# Altium PCB main.PcbDoc
Units mil, origin at the board's own origin, x right, y up, seen from the top; angles counter-clockwise.
Board outline 2165.35 x 1082.68 mil, 2 copper layers (Top Layer, Bottom Layer); 41 components, 28 nets, 122 pads, 68 vias.
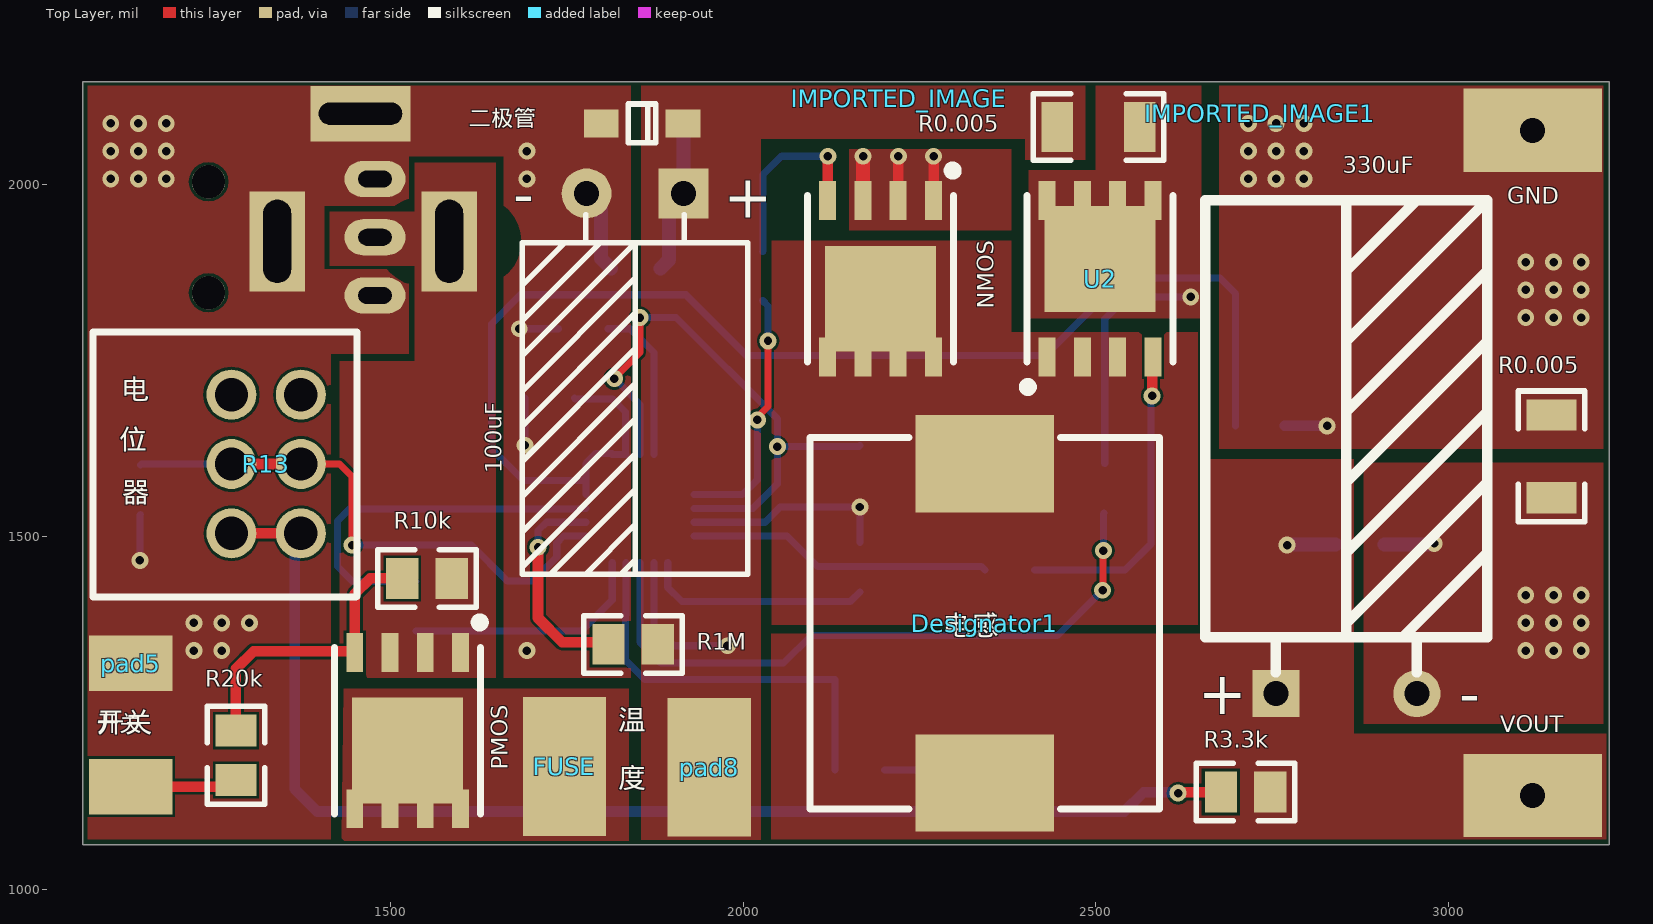
[diagram p0: Top Layer view]
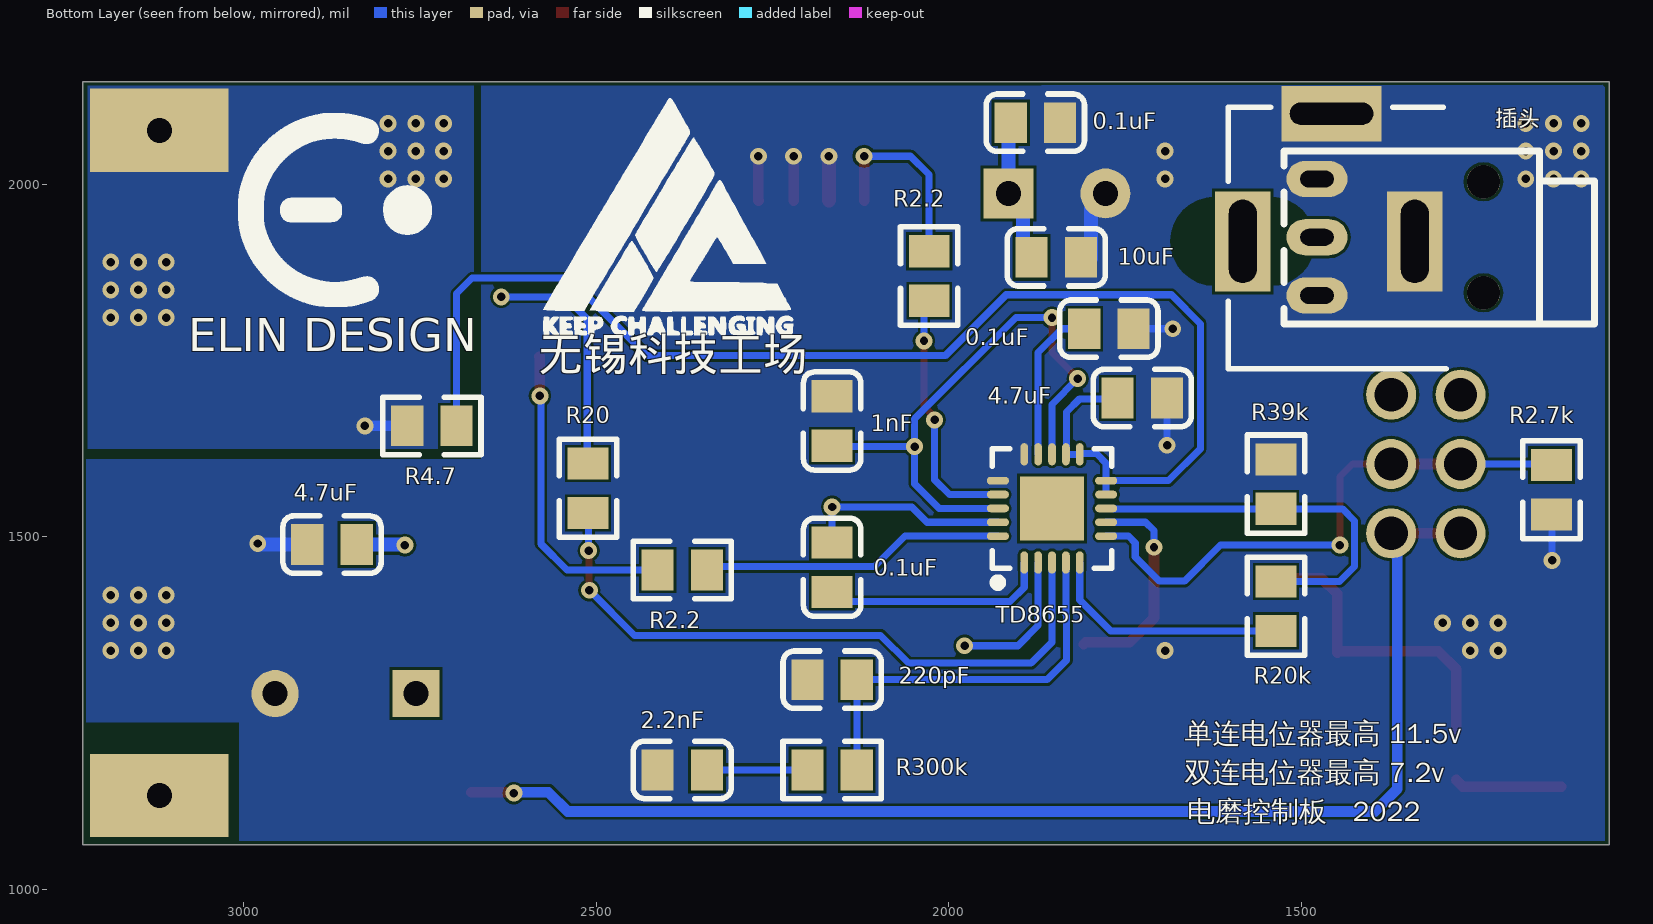
[diagram p1: Bottom Layer view, seen from below]
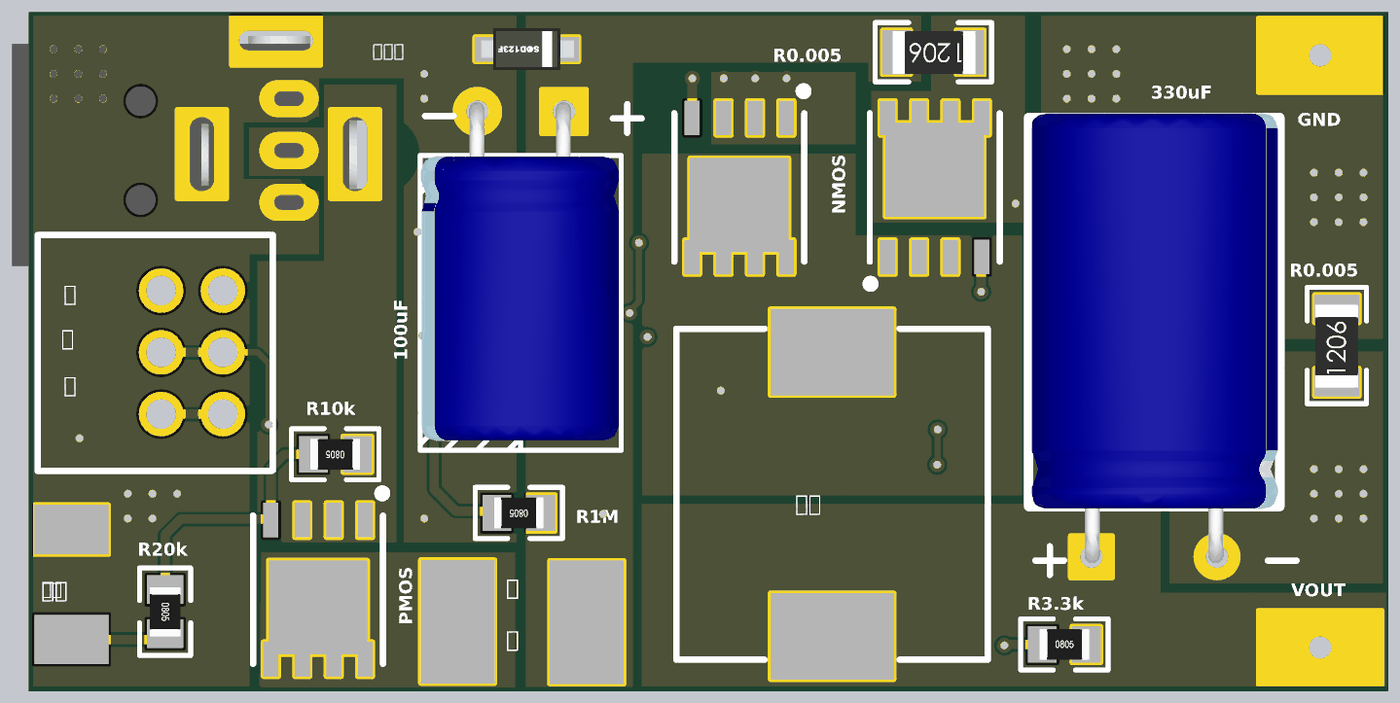
[diagram p2: 3D render of the assembled board from above, using the file's embedded part models]
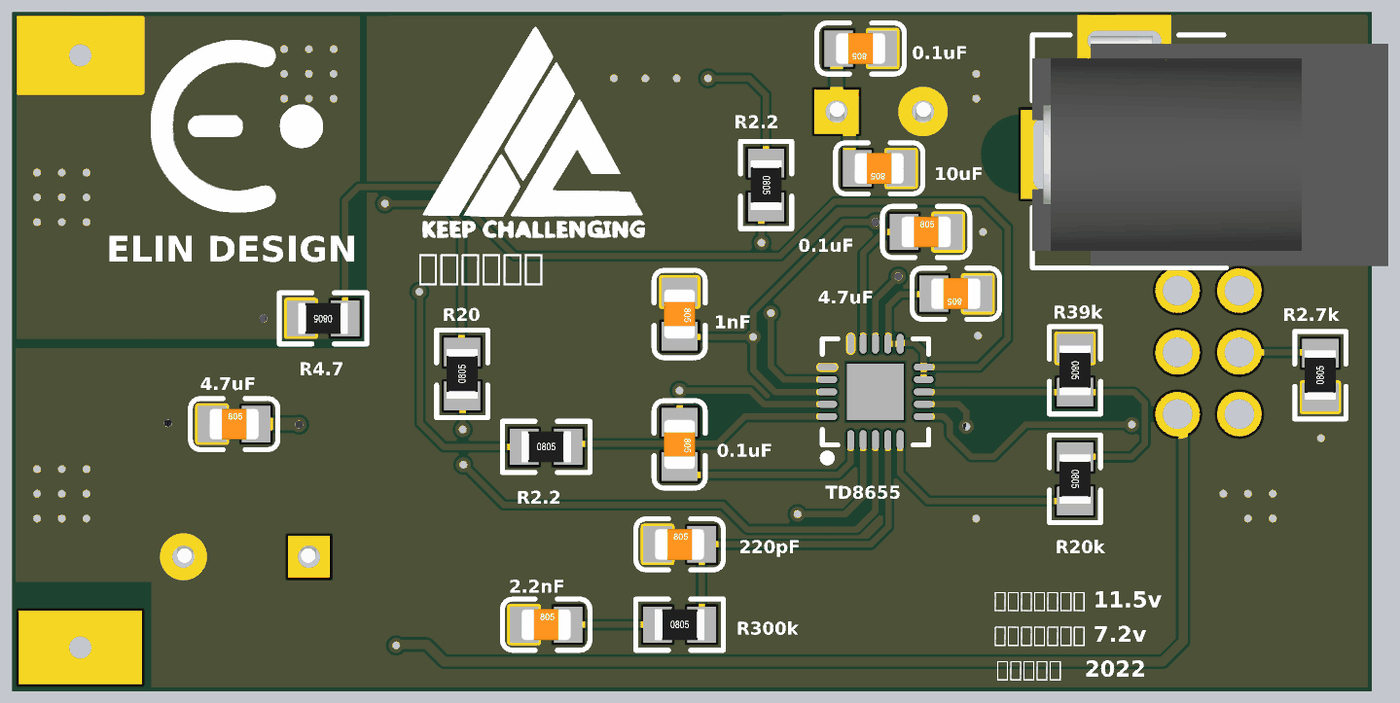
[diagram p3: 3D render of the assembled board from below, using the file's embedded part models]

## Layer stack, top to bottom
Top Solder: solder mask 0.4, Solder Resist, Dk 3.5
Top Layer: signal copper 1.4
Dielectric 1: dielectric 12.6, FR-4, Dk 4.8
Bottom Layer: signal copper 1.4
Bottom Solder: solder mask 0.4, Solder Resist, Dk 3.5

## Board outline
1062.99,1062.99 1062.99,2145.67 3228.35,2145.67 3228.35,1062.99

## Design rules (kind name [scope] priority, off if disabled: settings)
Clearance [All] p1: gap=4 ignorepadtopadclearanceinfootprint=FALSE
PlaneClearance [All] p1: clearance=31.5
PlaneConnect [All] p1: planeconnectstyle=Direct reliefexpansion=20 reliefentries=4 reliefconductorwidth=10 reliefairgap=10
PolygonConnect [All] p1: connectstyle=Direct reliefconductorwidth=10 reliefentries=4 polygonreliefangle="90 Angle" airgapwidth=10
RoutingVias [All] p1: holewidth=12 width=24 viastyle="Through Hole" minholewidth=10 minwidth=18 maxholewidth=28 maxwidth=50
SolderMaskExpansion [All] p1: expansion=4
Width [All] p1: maxlimit=100 minlimit=4 preferedwidth=6
28 further rules are at their usual default settings.

## Classes and differential pairs
component class td8655: 0.1uF 0.1Uf 1nF 2.2nF 2.7K 4.7uF 10uF 100uF 220pF 330uF FUSE GND NMOS pad5 pad8 PMOS R0.005 R1M R2.2 R3.3k R4.7 R10k R13 R20 R20k R39k R300k TD8655 U2 VOUT 二极管 开关 插头

## Components (designator, comment, footprint, x,y, rotation, side; value= is the part's Value field where it differs from the comment)
0.1uF "100nF" 0805_C 1772.64,1795.28 r180 bottom (schematic designator C8)
0.1uF "100nF" 0805_C 2165.35,1456.69 r270 bottom (schematic designator C7)
0.1uF "0.1uF" 0805_C 1876.97,2087.6 r0 bottom (schematic designator C3)
1nF "1uF" 0805_C 2165.35,1664.37 r270 bottom (schematic designator C4)
2.2nF "2.2nF" 0805_C 2377.95,1169.29 r180 bottom (schematic designator C5)
4.7uF "4.7uF" 0805_C 2875,1489 r180 bottom (schematic designator C10)
4.7uF "4.7uF" 0805_C 1725.39,1696.85 r0 bottom (schematic designator C9)
10uF "10uF" 0805_C 1847.44,1896.65 r0 bottom (schematic designator C2)
100uF "100uF" DIP-EC3.5X8X11.5-A 1915.35,1987.2 r270 top locked (schematic designator C1)
220pF "220pF" 0805_C 2165.35,1297.24 r180 bottom (schematic designator C6)
330uF "330uF" DIP-EC5.0X10X16-A 2755.71,1277.56 r90 top locked (schematic designator C11)
Designator1 "Comment" 1365电感 2347.52,1295.28 r90 top
FUSE "pwr" "PAD 3*5"#1 1746.06,1174.21 r180 top (schematic designator pad7)
GND "gnd_out" "PAD 3*5"#2 3120.08,2076.77 r90 top (schematic designator pad1)
IMPORTED_IMAGE "Comment" IMPORTED_IMAGE 2220.47,2122.05 r0 top
IMPORTED_IMAGE1 "Comment" IMPORTED_IMAGE 2733.3,2101.28 r0 top (schematic designator IMPORTED_IMAGE)
NMOS "nmos" LC-DFN-8_5x6mm 2194.68,1866.14 r180 top (schematic designator U3)
pad5 "S1" PAD3*3 1130.91,1320.87 r90 top
pad8 "VIN" "PAD 3*5"#1 1951.77,1173.23 r0 top
PMOS "pmos" LC-DFN-8_5x6mm 1523.62,1225.04 r180 top (schematic designator U4)
R0.005 "0.005" 1206_R 2503.94,2081.69 r180 top (schematic designator R8)
R0.005 "0.005" 1206_R 3146.65,1614.17 r90 top (schematic designator R6)
R1M "1M" 0805_R 1843.5,1347.44 r180 top (schematic designator R4)
R2.2 "2.2" 0805_R 2027.56,1870.08 r270 bottom (schematic designator R10)
R2.2 "2.2" 0805_R 2377.95,1452.76 r180 bottom (schematic designator R9)
R2.7k "2.7k" 0805_R 1144.68,1566.93 r90 bottom (schematic designator R12)
R3.3k "3.3k" 0805_R 2712.6,1137.8 r0 top (schematic designator R11)
R4.7 "4.7" 0805_R 2733.27,1657.48 r0 bottom (schematic designator R5)
R10k "10k" 0805_R 1551.18,1440.94 r180 top (schematic designator R15)
R13 "电位器20K" RK097N电位器 1084.29,1800.71 r180 top
R20 "20" 0805_R 2511.81,1568.9 r90 bottom (schematic designator R7)
R20k "20k" 0805_R 1280,1190 r270 top (schematic designator R14)
R20k "20K" 0805_R 1535.43,1401.57 r270 bottom (schematic designator R3)
R39k "39K" 0805_R 1535.43,1574.8 r270 bottom (schematic designator R2)
R300k "300K" 0805_R 2165.35,1169.29 r180 bottom (schematic designator R1)
TD8655 "TD8655" LC-QFN-20_4x4x05P 1853.35,1540.35 r180 bottom (schematic designator U1)
U2 "nmos" LC-DFN-8_5x6mm 2506.1,1866.14 r0 top
VOUT "VOUT" "PAD 3*5"#2 3120.08,1132.87 r90 top (schematic designator pad2)
二极管 "SMF 11.0A" LC-SOD-123F 1856.3,2086.61 r180 top (schematic designator D1)
开关 "S2" PAD3*3 1130.91,1145.67 r270 top (schematic designator pad6)
插头 "DC05" dc003005互通 1460.63,1962.6 r0 bottom (schematic designator DC05)

## Footprints (in the part's own frame and the unit in brackets; to place one, negate y for a bottom-side part, rotate by r counter-clockwise, add the part's x,y. Pads: shape width x height; smd on the part's side, far side on the other; paste and mask are expansions set on the pad)
0805_C [mm]
  rect 1.16x1.47 smd: 1(-0.89,0) 2(0.89,0)
  silkscreen extent -1.77,-1.04 1.77,1.04, body extent -1,-0.63 1,0.62, height 0.77
0805_R [mm]
  rect 1.16x1.47 smd: 1(-0.89,0) 2(0.89,0)
  silkscreen extent -1.77,-1.04 1.77,1.03, body extent -1,-0.63 1,0.63, height 0.49
1206_R [mm]
  rect 1.13x1.8 smd: 1(-1.49,0) 2(1.49,0)
  silkscreen extent -2.36,-1.2 2.35,1.2, body extent -1.7,-0.86 1.65,0.87, height 0.85
1365电感 [mm]
  rect 3.5x5 smd: 1(-3.667,0.127) 2(7.833,0.127)
  silkscreen extent -4.62,-6.17 8.78,6.43
dc003005互通 [mm] "互通插头"
  oval 2.2x1.3 hole 0.6 slot 1.2 at 0 deg: 1(0.425,0.953) 2(0.425,3.053) 3(0.425,-1.147)
  rect 2x3.6 hole 3 slot 1 at 0 deg: 1(3.1,1.1) 2(-3.1,1.1)
  rect 3.6x2 hole 3 slot 0.8 at 90 deg: 3(-0.1,-3.5)
  round 1.2 hole 1.2 unplated: ""(-5.575,-1.047) ""(-5.575,2.953)
  silkscreen extent -9.57,-3.73 3.62,5.7, body extent -10.78,-3.68 3.62,5.62, height 11
DIP-EC3.5X8X11.5-A [mm]
  rect 1.8x1.8 hole 0.9: 1(0,0)
  round 1.8 hole 0.9: 2(0,-3.5)
  silkscreen extent 0.76,-5.81 13.72,2.31, body extent -0.38,-5.78 13.33,2.23, height 8.03
DIP-EC5.0X10X16-A [mm]
  rect 1.7x1.7 hole 0.9: 1(0,0)
  round 1.7 hole 0.9: 2(0,-5.08)
  silkscreen extent 0.76,-7.62 17.78,2.54, body extent -0.25,-7.54 17.96,2.46, height 10.03
IMPORTED_IMAGE [mil]
LC-DFN-8_5x6mm [mm]
  rect 0.61x1.4 smd: D(-1.905,2.816) D(-0.635,2.816) D(0.635,2.816) D(1.905,2.816) G(1.905,-2.816) S(-1.905,-2.816) S(-0.635,-2.816) S(0.635,-2.816)
  rect 4x3.81 smd: D(0,0.716)
  silkscreen extent -2.73,-4.02 2.63,3
LC-QFN-20_4x4x05P [mm]
  rect 2.3x2.3 smd mask+0.051: 0(0,0)
  oval 0.28x0.8 smd mask+0.051: 1(-1,-1.95) 2(-0.5,-1.95) 3(0,-1.95) 4(0.5,-1.95) 5(1,-1.95) 11(1,1.95) 12(0.5,1.95) 13(0,1.95) 14(-0.5,1.95) 15(-1,1.95)
  oval 0.8x0.28 smd mask+0.051: 6(1.95,-1) 7(1.95,-0.5) 8(1.95,0) 9(1.95,0.5) 10(1.95,1) 16(-1.95,1) 17(-1.95,0.5) 18(-1.95,0) 19(-1.95,-0.5) 20(-1.95,-1)
  silkscreen extent -2.15,-2.82 2.15,2.15
LC-SOD-123F [mm]
  rect 1.25x1 smd: 1(1.475,0) 2(-1.475,0)
  silkscreen extent -0.5,-0.7 0.5,0.7, body extent -1.9,-0.85 1.85,0.85, height 1.2
PAD3*3 [mm] "3MM*3MM"
  rect 2x3 smd: 1(0,0)
"PAD 3*5"#1 [mm]
  rect 3x5 smd: 1(0,0)
"PAD 3*5"#2 [mm]
  rect 3x5 hole 0.9: 1(0,0)
RK097N电位器 [mm]
  round 1.8 hole 1.2: 1(-7.309,7.513) 1(-4.809,7.513) 2(-7.309,5.013) 2(-4.809,5.013) 3(-7.309,2.513) 3(-4.809,2.513)
  silkscreen extent -9.33,0.26 0.18,9.81

## Part data
0.1uF 0.1uF 0.1uF 1nF 2.2nF 4.7uF 4.7uF 10uF 220pF: library part C
100uF 330uF: library part CD
FUSE GND pad5 pad8 VOUT 开关: library part pad1
R0.005 R0.005 R1M R2.2 R2.2 R2.7k R3.3k R4.7 R10k R20 R20k R20k R39k R300k: library part R
R13: library part potentialmeter
二极管: library part DIODE
插头: "DC05电源"

## Via types
v1: diameter 24, hole 12, Top Layer to Bottom Layer, tented both sides, 68 vias

## Nets (pads, with @x,y where several pads share a name; then routed paths per layer and width w, separated by ;. In a path a pad name is that pad's centre, name@x,y a point inside that pad or via, vN(x,y) a via of type N, cw(c..) or ccw(c..) an arc to the next point about the centre after c; other vN are vias at no path point)
COMP: 220pF.2 R300k.2 TD8655.4 | length 576.2
  Bottom Layer w10: TD8655.4 1833.66,1389.43 1832.68,1388.44 1832.68,1324.8 1860.24,1297.24 220pF.2 R300k.2
CS34: 1nF.2 TD8655.13 TD8655.18 | length 820.9
  Top Layer w10: v1(1816.93,1724.41) 1816.93,1725.39 1853.35,1761.81 v1(1853.35,1811.02)
  Bottom Layer w10: v1(1816.93,1724.41) 1853.35,1687.99 TD8655.13 ; v1(1853.35,1811.02) 1904.67,1811.02 2048.23,1667.47 v1(2048.23,1627.95) ; TD8655.18 2013.35,1540.35 2048.23,1575.23 v1(2048.23,1627.95) ; 1nF.2 2163.98,1627.95 v1(2048.23,1627.95)
FB: R2.7k.2 R13.2 TD8655.6 | length 796.5
  Top Layer w10: R13.2@1372.05,1603.35 1427.17,1603.35 1444.88,1585.63 v1(1444.88,1488.19)
  Top Layer w15: R13.2@1273.62,1603.35 R13.2@1372.05,1603.35
  Bottom Layer w10: R2.7k.2 1146.06,1603.35 R13.2@1273.62,1603.35 ; v1(1444.88,1488.19) 1614.17,1488.19 1665.35,1437.01 1700.79,1437.01 1735.24,1471.46 1735.24,1491.14 1745.08,1500.98 TD8655.6
GND: 0.1uF.1@1841.93,2087.6 0.1uF.2@1737.6,1795.28 1nF.1 2.2nF.1 4.7uF.1 10uF.1 100uF.2 220pF.1 330uF.2 NMOS.S pad5.1 R0.005.1@3146.65,1555.51 R2.7k.1 R39k.1 TD8655.15 TD8655.16 二极管.1 插头.2 插头.3 | length 571.3
  Top Layer w15: v1@2169.68,2040 v1(2170,2040) ; NMOS.S@2219.68,1977.01 2219.68,2040 v1(2220,2040) ; NMOS.S@2269.68,1977.01 2270,1977.01 v1(2270,2040)
  Top Layer w20: NMOS.S@2169.68,1977.01 v1@2169.68,2040
  Bottom Layer w10: v1(1143.7,1466.54) 1143.7,1530.91 R2.7k.1 ; v1@1681.1,1794.29 v1(1682.09,1795.28) 0.1uF.2@1737.6,1795.28 ; v1(1689.96,1629.92) 1689.96,1696.46 4.7uF.1@1690.35,1696.85
  Bottom Layer w20: 100uF.2 1777.56,1985.57 1798.23,1964.9 1798.23,1895.08 10uF.1@1812.4,1880.91 ; 4.7uF.1@2910.04,1489 2978.75,1489 v1(2980.32,1490.56)
  other v1: 1220.47,1338.58 1259.84,1338.58 1692.91,1338.58 3110.24,1338.58 3149.61,1338.58 3188.98,1338.58 1220.47,1377.95 1259.84,1377.95 1299.21,1377.95 3110.24,1377.95 3149.61,1377.95 3188.98,1377.95 3110.24,1417.32 3149.61,1417.32 3188.98,1417.32 1102.36,2007.87 1141.73,2007.87 1181.1,2007.87 1692.91,2007.87 1102.36,2047.24 1141.73,2047.24 1181.1,2047.24 1692.91,2047.24 1102.36,2086.61 1141.73,2086.61 1181.1,2086.61
GND_OUT: GND.1 R0.005.2@3146.65,1672.83 R4.7.2 | length 60
  Bottom Layer w15: R4.7.2 v1(2828.27,1657.48)
  other v1: 3110.24,1811.02 3149.61,1811.02 3188.98,1811.02 3110.24,1850.39 3149.61,1850.39 3188.98,1850.39 3110.24,1889.76 3149.61,1889.76 3188.98,1889.76 2716.54,2007.87 2755.91,2007.87 2795.28,2007.87 2716.54,2047.24 2755.91,2047.24 2795.28,2047.24 2716.54,2086.61 2755.91,2086.61 2795.28,2086.61
HSD: R2.2.2@2342.91,1452.76 TD8655.20 | length 432.8
  Bottom Layer w10: TD8655.20 2062.01,1500.98 2105.32,1457.68 2337.99,1457.68 R2.2.2@2342.91,1452.76
ISENSE: R20.1 TD8655.3 | length 935.2
  Top Layer w10: v1(2509.84,1424.21) 2510.33,1424.7 2510.33,1479.82 v1(2510.83,1480.32)
  Bottom Layer w10: TD8655.3 1853.35,1350.39 1882.87,1320.87 2057.09,1320.87 2096.46,1360.24 2445.87,1360.24 v1(2509.84,1424.21) ; v1(2510.83,1480.32) 2510.83,1532.87 R20.1
ISET: R20k.1@1535.43,1436.61 R39k.2 TD8655.8 | length 544.9
  Bottom Layer w10: R20k.1@1535.43,1436.61 1445.28,1436.61 1423.88,1458.01 1423.88,1522.31 1441.34,1539.76 R39k.2 1765.47,1539.76 1766.06,1540.35 TD8655.8
LSD: R2.2.2@2027.56,1835.04 TD8655.17 | length 361.9
  Top Layer w10: v1(2020,1666) 2020,1669.79 2035,1684.79 v1(2035,1778)
  Bottom Layer w10: TD8655.17 1999.04,1560.04 2020,1581 v1(2020,1666) ; R2.2.2@2027.56,1835.04 2035,1827.6 v1(2035,1778)
NetC5_2: 2.2nF.2 R300k.1 | length 142.5
  Bottom Layer w10: R300k.1 2.2nF.2
NetC7_2: 0.1uF.2@2165.35,1421.65 TD8655.1 | length 322.1
  Bottom Layer w10: TD8655.1 1892.72,1428.15 1912.87,1408 2151.7,1408 0.1uF.2@2165.35,1421.65
NetC8_1: 0.1uF.1@1807.68,1795.28 TD8655.14 | length 223.8
  Bottom Layer w10: 0.1uF.1@1807.68,1795.28 1839.4,1795.28 1873.03,1761.64 TD8655.14
NetC9_2: 4.7uF.2@1760.43,1696.85 R4.7.1 TD8655.9 TD8655.10 TD8655.11 TD8655.12 | length 1929.5
  Bottom Layer w10: 4.7uF.2@1760.43,1696.85 1761.42,1695.87 1813.98,1695.87 1832.68,1677.17 TD8655.12@1832.68,1617.13 ; TD8655.9 TD8655.10 ; TD8655.12 TD8655.12@1832.68,1617.13 ; R4.7.1 2698.23,1845.08 2676.18,1867.13 2538.39,1867.13 2428.26,1757 2004.81,1757 1918.31,1843.5 1684.06,1843.5 1642.72,1802.17 1642.72,1625 1687.99,1579.72 TD8655.10 ; TD8655.10 1776.57,1604.33 1790.35,1618.11 1813.5,1618.11 TD8655.11@1813.98,1617.64 ; TD8655.11@1813.98,1617.64 TD8655.11@1814.49,1617.13 ; TD8655.11@1813.98,1617.64 TD8655.11 TD8655.11@1814.49,1617.13 ; TD8655.11@1814.49,1617.13 TD8655.12@1832.68,1617.13
Netpad3_1: 
Netpad4_1: 
Netpad6_1: R20k.2@1280,1154.96 开关.1 | length 152.9
  Top Layer w15: 开关.1 1270.71,1145.67 R20k.2@1280,1154.96
Netpad7_1: FUSE.1 PMOS.D
NetR3_2: R20k.2@1535.43,1366.54 TD8655.5 | length 349.9
  Bottom Layer w10: R20k.2@1535.43,1366.54 1770.08,1366.54 1813.98,1410.43 TD8655.5
NetR4_2: R1M.2 TD8655.7 | length 312.1
  Top Layer w15: v1(1708.66,1485.24) 1708.66,1384.87 1743.13,1350.39 1805.51,1350.39 R1M.2
  Bottom Layer w10: v1(1708.66,1485.24) 1708.66,1508.86 1720.47,1520.67 TD8655.7
NetR7_2: R0.005.1@2562.6,2081.69 R20.2 U2.D | length 340.2
  Bottom Layer w10: R20.2@2512.8,1603.94 2512.8,1809.06 2544.29,1840.55 v1(2634.84,1840.55)
NetR9_1: R2.2.1@2412.99,1452.76 U2.G | length 448
  Top Layer w15: v1(2580,1700) 2580,1755.28 U2.G
  Bottom Layer w10: R2.2.1@2412.99,1452.76 2541.34,1452.76 2578.74,1490.16 2578.74,1698.74 v1(2580,1700)
NetR10_1: NMOS.G R2.2.1@2027.56,1905.12 | length 275.1
  Top Layer w15: NMOS.G 2119.68,2040 v1(2120,2040)
  Bottom Layer w10: R2.2.1@2027.56,1905.12 2028,1905.56 2028,2014 2054,2040 v1(2120,2040)
NetR11_1: R3.3k.1 R13.1 | length 1803.3
  Top Layer w15: R13.1@1273.62,1504.92 R13.1@1372.05,1504.92 ; v1(2616.97,1136.22) 2616.97,1137.8 R3.3k.1
  Bottom Layer w15: R13.1@1372.05,1504.92 1363.19,1496.06 1363.19,1142.72 1395.67,1110.24 2540.35,1110.24 2567.91,1137.8 2614.61,1137.8 v1@2615,1138.19
NetR14_1: PMOS.G R10k.2 R20k.1@1280,1225.04 | length 426.9
  Top Layer w15: R20k.1@1280,1225.04 1280,1312.48 1305.12,1337.6 1446.93,1337.6 PMOS.G 1448.62,1419.09 1470.47,1440.94 R10k.2
PWR: PMOS.S R10k.1 插头.1
SW: 0.1uF.1@2165.35,1491.73 Designator1.2 NMOS.D TD8655.19 U2.S | length 294.8
  Bottom Layer w10: TD8655.19 2030.67,1520.67 2052.35,1542.35 v1(2165.35,1542.35) 0.1uF.1@2165.35,1491.73
VIN: 0.1uF.2@1912.01,2087.6 10uF.2 100uF.1 pad8.1 R0.005.2@2445.28,2081.69 R1M.1 TD8655.2 二极管.2 | length 427.4
  Bottom Layer w10: TD8655.2 1873,1374.05 1901.57,1345.47 v1(1977.36,1345.47) ; 100uF.1@1894.68,1966.54 100uF.1 ; 0.1uF.2@1912.01,2087.6 0.1uF.2@1915.35,2084.25
  Bottom Layer w20: 10uF.2@1882.48,1880.91 1894.68,1893.11 100uF.1@1894.68,1966.54 ; 100uF.1 0.1uF.2@1915.35,2084.25
VOUT: 4.7uF.2@2839.96,1489 330uF.1 Designator1.1 R3.3k.2 VOUT.1 | length 69.1
  Bottom Layer w10: v1(2771.65,1488.19) v1@2771.65,1489
  Bottom Layer w20: v1@2771.65,1489 4.7uF.2@2839.96,1489
pads on no net: R13.3 TD8655.0 插头.

## Polygon pours and split planes (outlines as drawn)
PWR on Top Layer "Top Layer-PWR" (solid, remove dead copper, pour order 30): 1648.62,1300.2 1427.17,1300.2 1427.17,1749.02 1533.46,1749.02 1533.46,1884.84 1413.39,1884.84 1413.39,1961.61 1533.46,1961.61 1533.46,2030.51 1648.62,2030.51
NetR7_2 on Top Layer "Top Layer-NetR7_2" (solid, remove dead copper, pour order 10): 2500,2140 2500,2020 2405,2020 2405,1810 2650,1810 2650,2140
VIN on Top Layer "Top Layer-VIN" (solid, remove dead copper, pour order 8): 1855,2140 1855,1070 2025,1070 2025,2065 2400,2065 2400,2035 2485,2035 2485,2140
VOUT on Top Layer "Top Layer-VOUT" (solid, remove dead copper, pour order 26): 2039.37,1362.2 2039.37,1070.87 3224.41,1070.87 3224.41,1220.47 2866.14,1220.47 2866.14,1610.24 2657.48,1610.24 2657.48,1362.2
GND on Top Layer "Top Layer-GND" (solid, remove dead copper, pour order 24): 1070,2140 1840,2140 1840,1300 1660,1300 1660,2040 1525,2040 1525,1970 1405,1970 1405,1880 1525,1880 1525,1760 1414.37,1760 1414.37,1070.87 1070,1070.87
SW on Top Layer "Top Layer-SW" (solid, remove dead copper, pour order 12): 2040,1920 2040,1375 2645,1375 2645,1790 2380,1790 2380,1920
GND on Top Layer "Top Layer-GND 1" (solid, pour order 22): 3220,1235 2880,1235 2880,1390 2880,1605 3220,1605
GND_OUT on Top Layer "Top Layer-GND_OUT" (solid, remove dead copper, pour order 20): 2675,2140 3220,2140 3220,1625 2675,1625
GND on Top Layer "Top Layer-GND 2" (solid, remove dead copper, pour order 14): 2150,2050 2150,1935 2380,1935 2380,2050
Netpad7_1 on Top Layer "Top Layer-Netpad7_1" (solid, pour order 4): 1433.07,1284.45 1837.6,1284.45 1837.6,1068.9 1430.12,1068.9
GND on Bottom Layer "Bottom Layer-GND" (solid, remove dead copper, pour order 34): 1068.9,2141.73 1068.9,1068.9 3006.89,1068.9 3006.89,1237.2 3223.43,1237.2 3223.43,1610.24 2663.39,1610.24 2663.39,2139.76
GND_OUT on Bottom Layer "Bottom Layer-GND_OUT" (solid, remove dead copper, pour order 36): 2674.21,2139.76 2674.21,1625 3221.46,1625 3221.46,2139.76

## Silkscreen, mask and mechanical layers (free items; w line width, h text height)
Top Overlay:
  text "-" at 1673.23,1956.69 h60
  text "+" at 1972.44,1952.76 h60
  text "电" at 1118.11,1685.04 h50
  text "位" at 1114.17,1614.17 h50
  text "器" at 1118.11,1539.37 h50
  text "电感" at 2283.46,1350.39 h50
  text "+" at 2645.67,1248.03 h60
  text "-" at 3015.75,1248.03 h60
  text "温" at 1822.83,1216.54 h50
  text "开关" at 1082.68,1212.6 h50
  text "度" at 1822.83,1133.86 h50
Bottom Overlay:
  text "ELIN DESIGN" at 3078.74,1748.03 h80
  text "无锡科技工场" at 2582.68,1720.47 h80
  text "单连电位器最高 11.5v" at 1665.35,1196.85 h50
  text "双连电位器最高 7.2v" at 1665.35,1141.73 h50
  text "电磨控制板   2022" at 1661.42,1086.61 h50
Mechanical 1:
  the board outline again, w10

## Dimensions
3228.35,1062.99 to 3228.35,2145.67 on Mechanical 1
1062.99,1062.99 to 3228.35,1062.99 on Mechanical 1